# Altium PCB Copy of Capstone.PcbDoc
Units mil, origin at the board's own origin, x right, y up, seen from the top; angles counter-clockwise.
Board outline 6000 x 4000 mil, 4 copper layers (Top Layer 1, GND, 5V 3.3V, Bottom Layer 1), stack 23.756 mil thick; 28 components, 36 nets, 185 pads, 0 vias.
Unrouted connection lines stored in the file: 73.
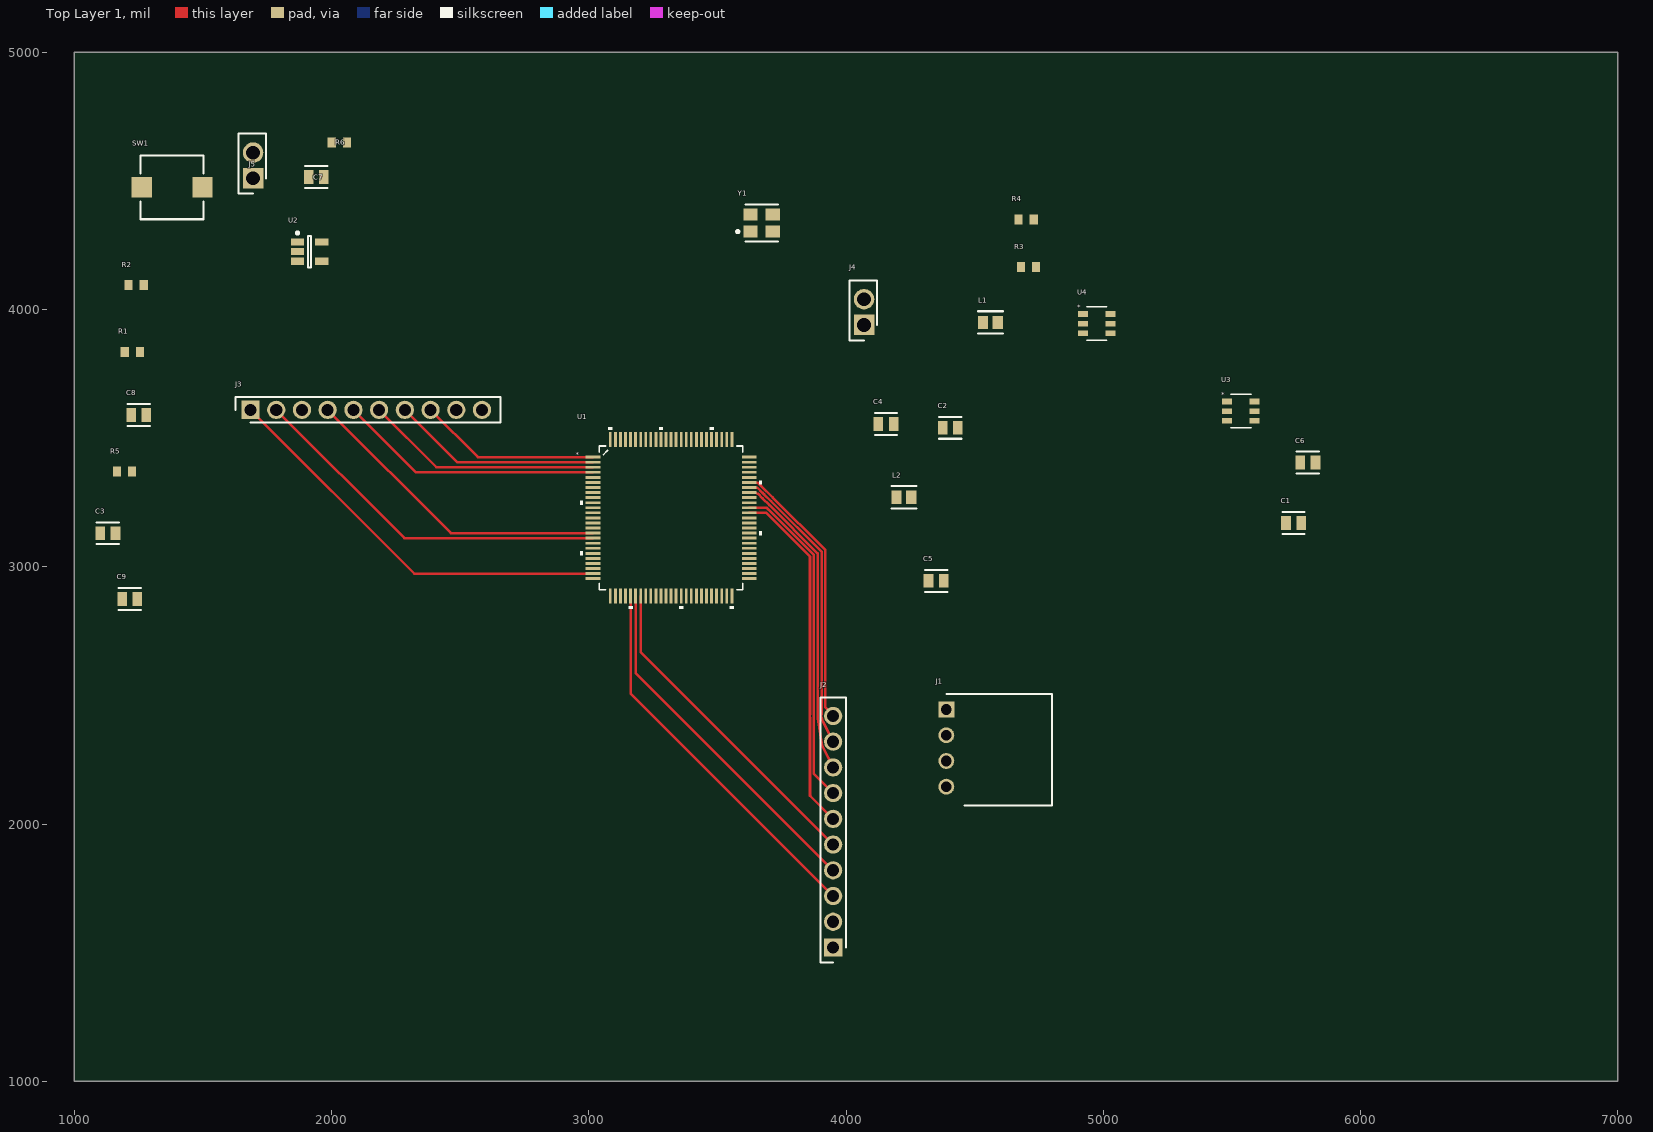
[diagram p0: Top Layer 1 view]
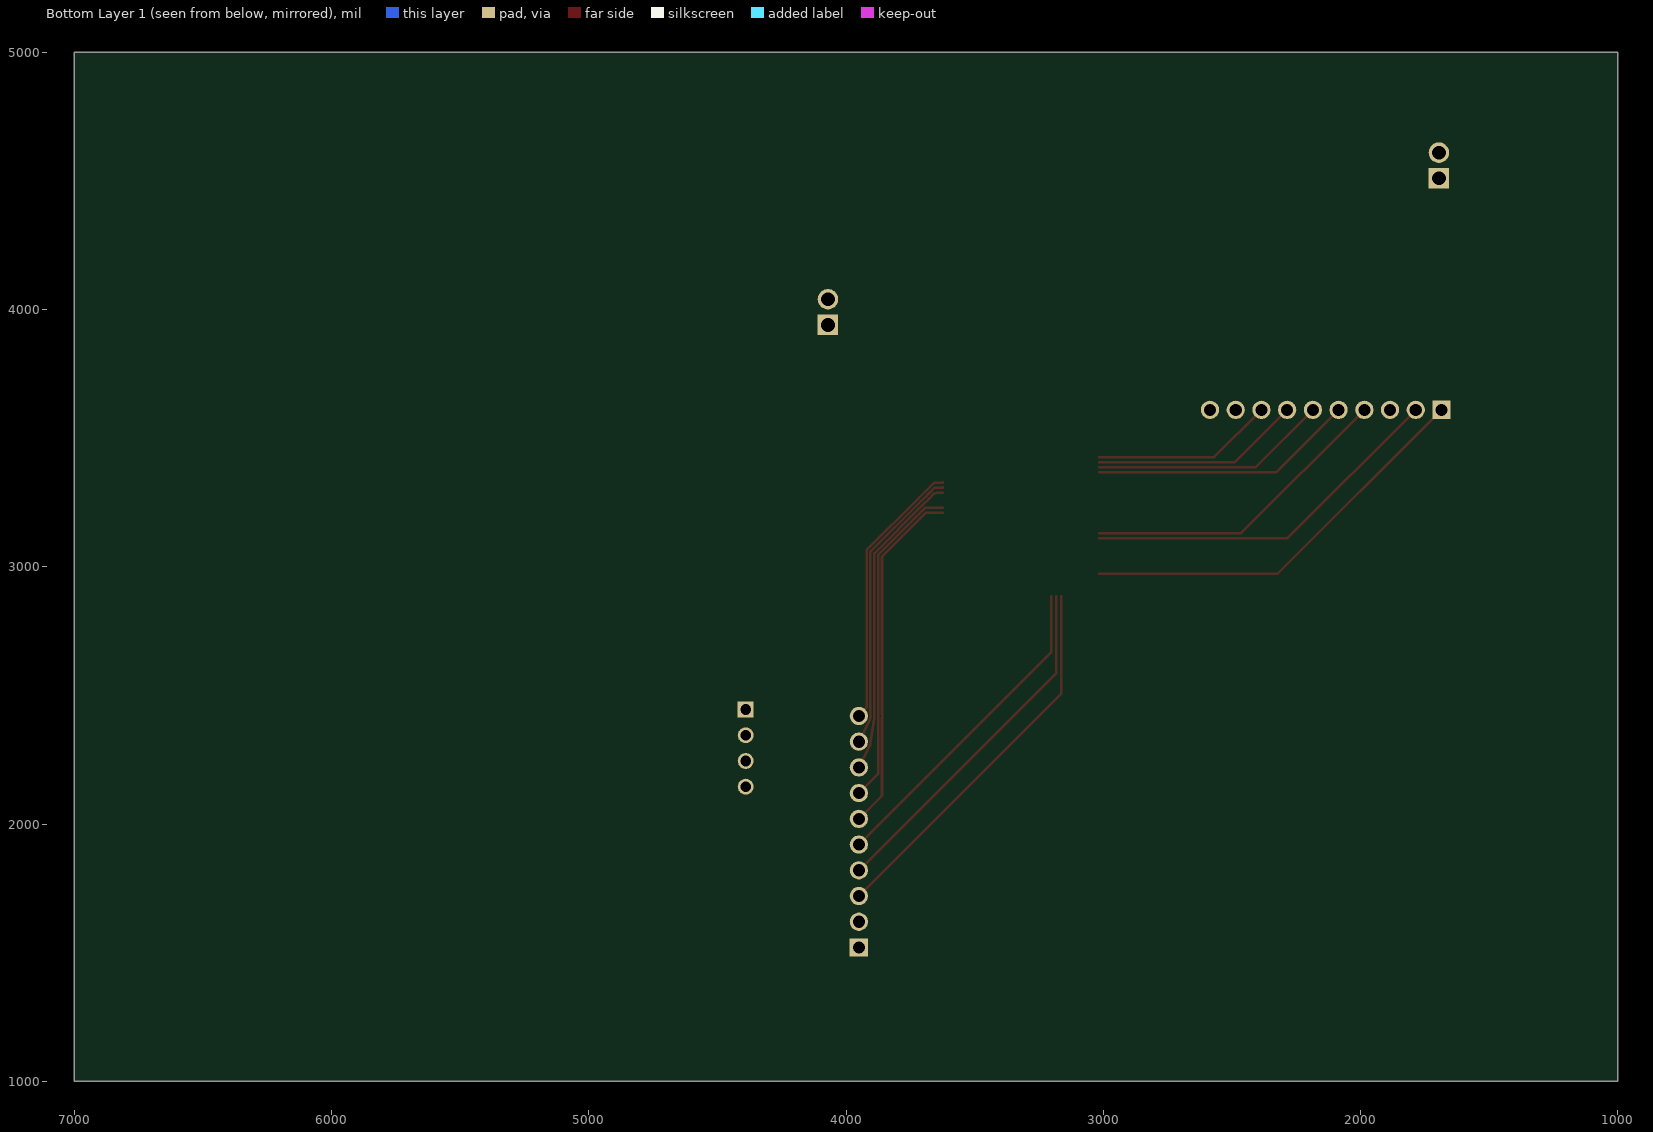
[diagram p1: Bottom Layer 1 view, seen from below]
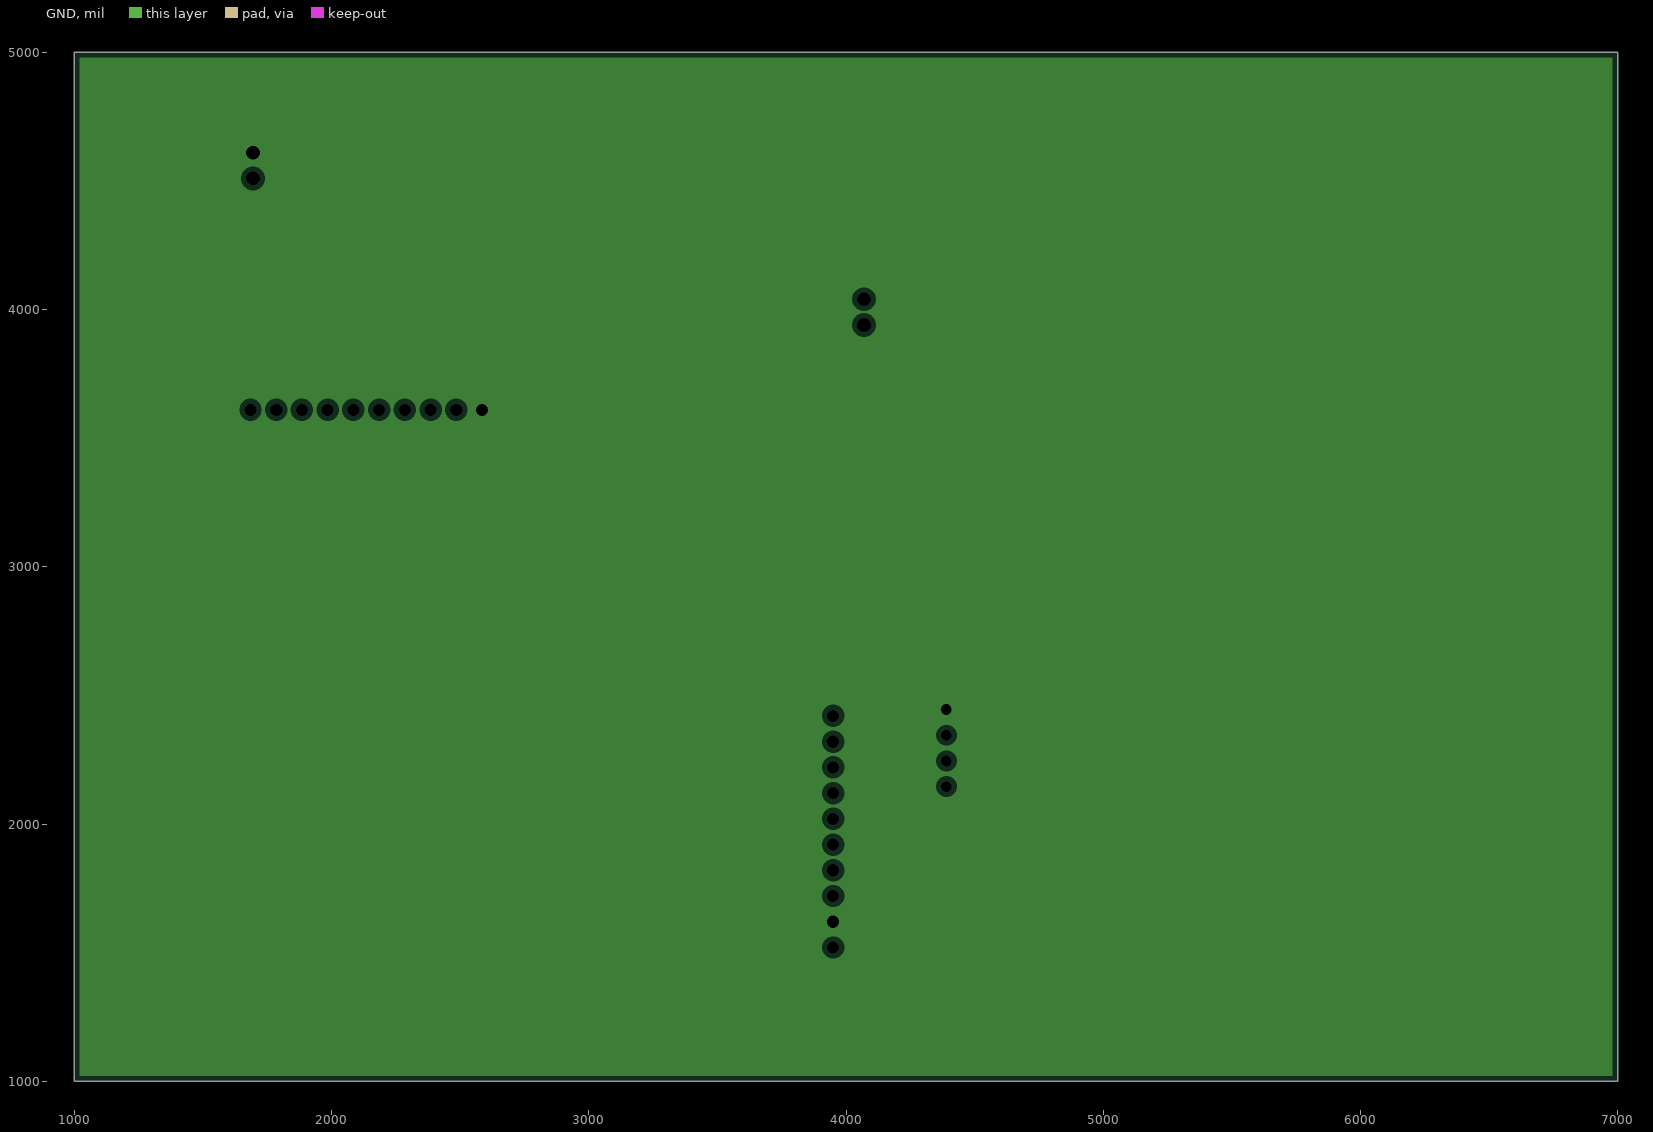
[diagram p2: GND, clearances drawn from the general rule]
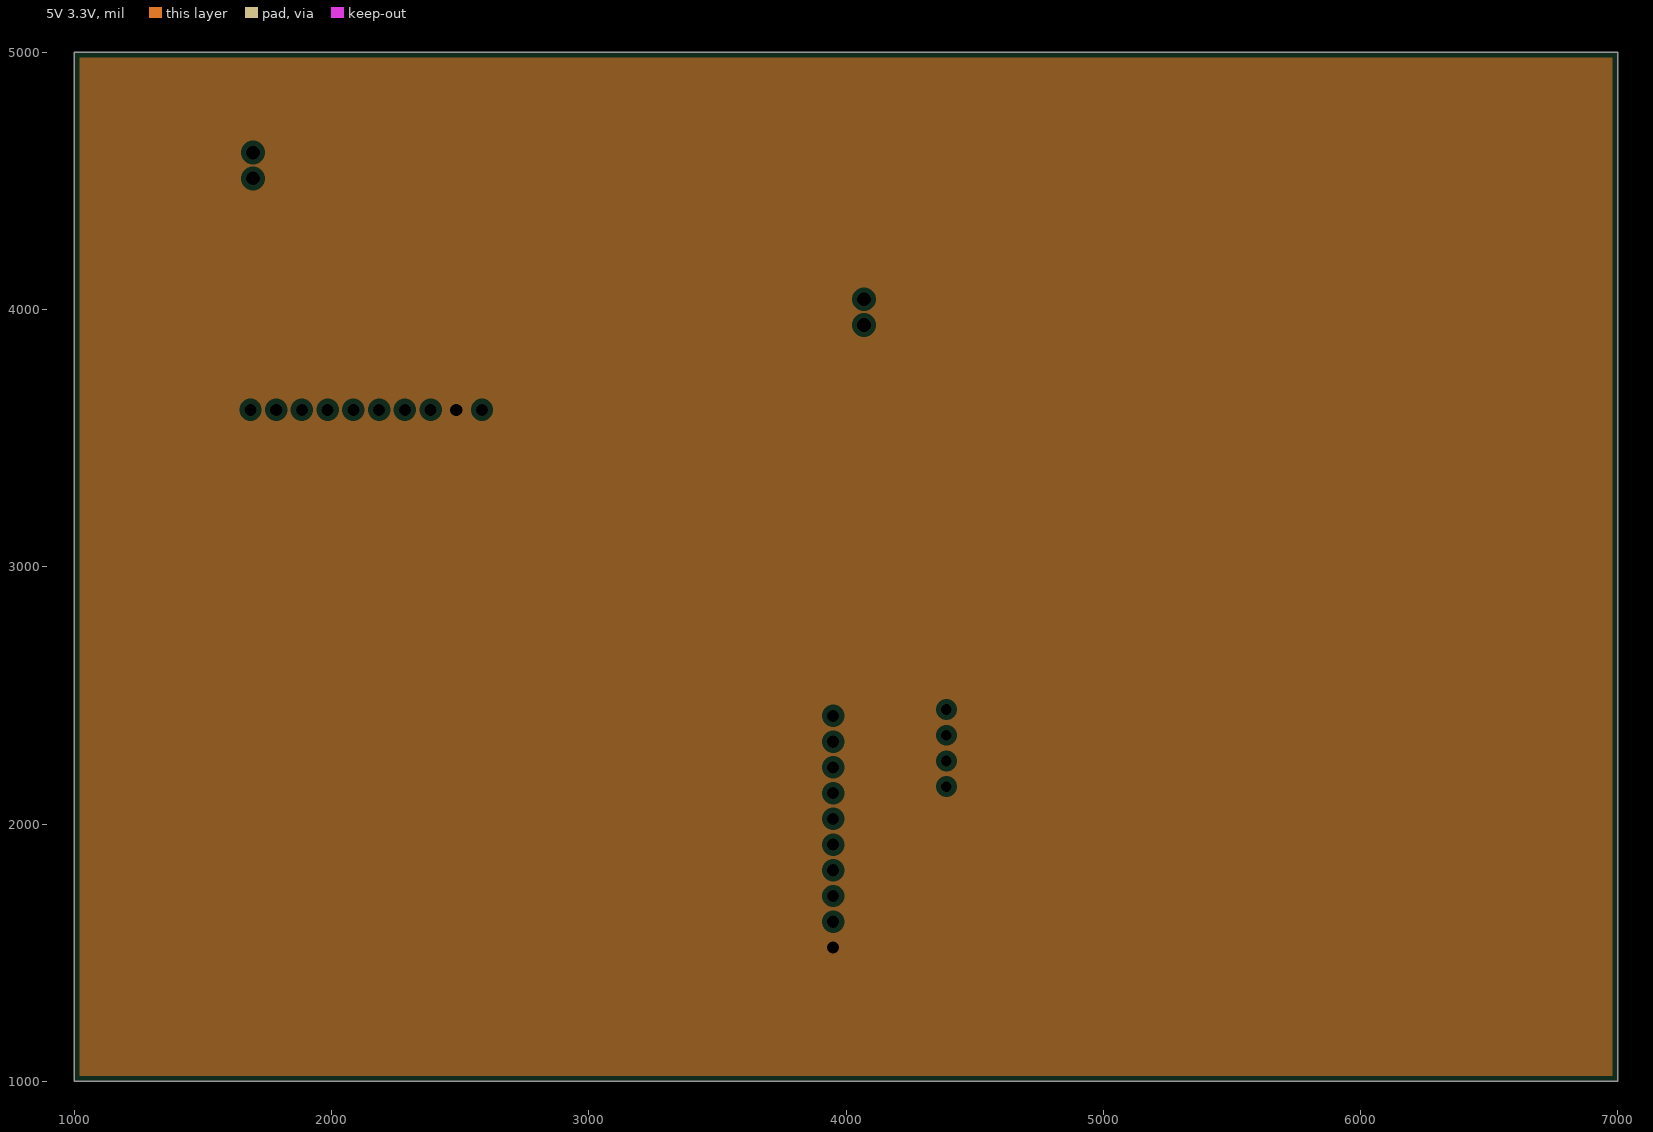
[diagram p3: 5V 3.3V, clearances drawn from the general rule]

## Layer stack, top to bottom
Top Solder: solder mask 0.4, Solder Resist, Dk 3.5
Top Layer 1: signal copper 1.378
Dielectric 2: prepreg 2.8, PP-006, Dk 4.1
GND: plane copper 1.4, net GND
Dielectric 1: dielectric 12.6, FR-4, Dk 4.8
5V 3.3V: plane copper 1.4, net 3.3V
Dielectric 3: prepreg 2.8, PP-006, Dk 4.1
Bottom Layer 1: signal copper 1.378
Bottom Solder: solder mask 0.4, Solder Resist, Dk 3.5

## Board outline
1000,1000 7000,1000 7000,5000 1000,5000

## Design rules (kind name [scope] priority, off if disabled: settings)
Clearance [All] p1: gap=5 ignorepadtopadclearanceinfootprint=FALSE
PlaneClearance [All] p1: clearance=20
PlaneConnect [All] p1: planeconnectstyle=Direct reliefexpansion=20 reliefentries=4 reliefconductorwidth=10 reliefairgap=10
PolygonConnect [All] p1: connectstyle=Relief reliefconductorwidth=10 reliefentries=4 polygonreliefangle="90 Angle" airgapwidth=10
RoutingVias [All] p1: holewidth=28 width=50 viastyle="Through Hole" minholewidth=28 minwidth=50 maxholewidth=28 maxwidth=50
SolderMaskExpansion [All] p1: expansion=4 istentingtop=FALSE
SupplyNets "Schematic Supply Nets_2" [InNet('GND')] p1: voltage=0.000
SupplyNets "Schematic Supply Nets_1" [InNet('5V')] p2: voltage=0.000
Width [All] p1: maxlimit=10 minlimit=10 preferedwidth=10
28 further rules are at their usual default settings.

## Classes and differential pairs
component class "U_Buck Converter 3.3V": C1 C2 C4 C5 L1 R3 R4 U3
component class "U_Buck Converter 5V": C6 C7 C8 C9 L2 R5 R6 U4
component class Capstone: C3 J1 J2 J3 J4 J5 R1 R2 SW1 U1 U2 Y1

## Components (designator, comment, footprint, x,y, rotation, side; value= is the part's Value field where it differs from the comment)
C1 "100nF" FP-C0805C-DN-MFG 5740,3170 r0 top value=10uF
C2 "10uF" FP-C0805C-DN-MFG 4405.47,3540 r0 top
C3 ".1uF" FP-C0805C-DN-MFG 1130.47,3130 r0 top value=10uF
C4 "100nF" FP-C0805C-DN-MFG 4155.47,3555 r0 top value=10uF
C5 "22uF" FP-C0805C-DN-MFG 4350.47,2945 r0 top value=10uF
C6 "100nF" FP-C0805C-DN-MFG 5795.47,3405 r0 top value=10uF
C7 "10uF" FP-C0805C-DN-MFG 1940.47,4515 r0 top
C8 "100nF" FP-C0805C-DN-MFG 1250.47,3590 r0 top value=10uF
C9 "10uF" FP-C0805C-DN-MFG 1215.47,2875 r0 top
J1 "PPPC041LGBN-RC" RHDRRA4W60P0X254_1X4_1066X850X274P 4390,2445 r270 top
J2 "M20-7821046" RHDR10W70P0X254_1X10_2580X250X865P 3950,1520 r90 top
J3 "M20-7821046" RHDR10W70P0X254_1X10_2580X250X865P 1685,3610 r0 top
J4 "PPPC021LFBN-RC" RHDR2W80P0X254_1X2_558X254X850P 4070,3940 r90 top
J5 "PPPC021LFBN-RC" RHDR2W80P0X254_1X2_558X254X850P 1695,4510 r90 top
L1 "4.7uH" FP-LQM21PH_G0-IPC_C 4561.41,3950 r0 top
L2 "4.7uH" FP-LQM21PH_G0-IPC_C 4225,3270 r0 top
R1 "1k" RESC1608X55X25ML10T15 1225.47,3835 r0 top
R2 "1k" RESC1608X55X25ML10T15 1240.47,4095 r0 top
R3 "69.8k" RESC1608X55X25ML10T15 4709.53,4165 r180 top
R4 "22.1k" RESC1608X55X25ML10T15 4700.47,4350 r0 top
R5 "115k" RESC1608X55X25ML10T15 1195.47,3370 r0 top
R6 "22.1k" RESC1608X55X25ML10T15 2030.47,4650 r0 top
SW1 "EVPASAC1A" FP-EVPASAC1A-MFG 1380,4475 r0 top
U1 "STM32U5A5VJT6" LQFP-100_STM 3320,3190 r0 top
U2 "MCP3021A5T-E/OT" SOT-23-OT5_M 1915,4225 r0 top
U3 "PLMR54410DBVR" U_SOT-23_TEX 5535,3605 r0 top
U4 "PLMR54410DBVR" U_SOT-23_TEX 4975,3945 r0 top
Y1 "ABM8G-24.000MHZ-B4Y-T3" FP-ABM8G-MFG 3671.69,4336.54 r0 top

## Footprints (in the part's own frame and the unit in brackets; to place one, negate y for a bottom-side part, rotate by r counter-clockwise, add the part's x,y. Pads: shape width x height; smd on the part's side, far side on the other; paste and mask are expansions set on the pad)
FP-ABM8G-MFG [mm]
  rect 1.4x1.2 smd paste+0 mask+0: 1(-1.1,-0.85) 2(1.1,-0.85) 3(1.1,0.85) 4(-1.1,0.85)
  silkscreen extent -2.47,-1.83 1.6,1.83, body extent -1.9,-1.55 1.9,1.55, height 0.25
FP-C0805C-DN-MFG [mm]
  rect 0.95x1.35 smd paste+0 mask+0: 1(-0.75,0) 2(0.75,0)
  silkscreen extent -1.1,-1.07 1.1,1.07, body extent -1.4,-0.85 1.4,0.85, height 0.25
FP-EVPASAC1A-MFG [mm]
  rect 2x2 smd paste+0 mask+0: A(-3,0) B(3,0)
  silkscreen extent -3.1,-3.15 3.1,3.15, body extent -4.1,-3.25 4.1,3.25, height 0.25
FP-LQM21PH_G0-IPC_C [mil]
  rect 39.61x51.5 smd paste+0 mask+0: 1(-28.59,0) 2(28.59,0)
  silkscreen extent -48,-43 48,43, body extent -52,-31 52,31, height 10
LQFP-100_STM [mil]
  rect 58x11 smd paste+0 mask+0: 1(-304,236.22) 2(-304,216.54) 3(-304,196.85) 4(-304,177.17) 5(-304,157.48) 6(-304,137.8) 7(-304,118.11) 8(-304,98.43) 9(-304,78.74) 10(-304,59.06) 11(-304,39.37) 12(-304,19.69) 13(-304,0) 14(-304,-19.68) 15(-304,-39.37) 16(-304,-59.06) 17(-304,-78.74) 18(-304,-98.43) 19(-304,-118.11) 20(-304,-137.8) 21(-304,-157.48) 22(-304,-177.17) 23(-304,-196.85) 24(-304,-216.54) 25(-304,-236.22) 51(304,-236.22) 52(304,-216.54) 53(304,-196.85) 54(304,-177.17) 55(304,-157.48) 56(304,-137.8) 57(304,-118.11) 58(304,-98.43) 59(304,-78.74) 60(304,-59.06) 61(304,-39.37) 62(304,-19.68) 63(304,0) 64(304,19.68) 65(304,39.37) 66(304,59.06) 67(304,78.74) 68(304,98.43) 69(304,118.11) 70(304,137.8) 71(304,157.48) 72(304,177.17) 73(304,196.85) 74(304,216.54) 75(304,236.22)
  rect 11x58 smd paste+0 mask+0: 26(-236.22,-304) 27(-216.54,-304) 28(-196.85,-304) 29(-177.17,-304) 30(-157.48,-304) 31(-137.8,-304) 32(-118.11,-304) 33(-98.43,-304) 34(-78.74,-304) 35(-59.06,-304) 36(-39.37,-304) 37(-19.68,-304) 38(0,-304) 39(19.68,-304) 40(39.37,-304) 41(59.06,-304) 42(78.74,-304) 43(98.43,-304) 44(118.11,-304) 45(137.8,-304) 46(157.48,-304) 47(177.17,-304) 48(196.85,-304) 49(216.54,-304) 50(236.22,-304) 76(236.22,304) 77(216.54,304) 78(196.85,304) 79(177.17,304) 80(157.48,304) 81(137.8,304) 82(118.11,304) 83(98.43,304) 84(78.74,304) 85(59.06,304) 86(39.37,304) 87(19.68,304) 88(0,304) 89(-19.68,304) 90(-39.37,304) 91(-59.06,304) 92(-78.74,304) 93(-98.43,304) 94(-118.11,304) 95(-137.8,304) 96(-157.48,304) 97(-177.17,304) 98(-196.85,304) 99(-216.54,304) 100(-236.22,304)
  silkscreen extent -353,-353 353,353, body extent -319,-319 319,319, height 63
RESC1608X55X25ML10T15 [mm] "Chip Resistor, 2-Leads, Body 1.60x0.80mm, IPC Low Density"
  rect 0.8x1 smd: 1(-0.75,0) 2(0.75,0)
  body extent -0.85,-0.45 0.85,0.45, height 0.55
RHDR2W80P0X254_1X2_558X254X850P [mm]
  rect 2.025x2.025 hole 1.35: 1(0,0)
  round 2.025 hole 1.35: 2(2.54,0)
  silkscreen extent -1.52,-1.27 4.41,1.46, body extent -1.52,-1.27 4.06,1.27, height 8.5
RHDR10W70P0X254_1X10_2580X250X865P [mm]
  rect 1.8x1.8 hole 1.2: 1(0,0)
  round 1.8 hole 1.2: 2(2.54,0) 3(5.08,0) 4(7.62,0) 5(10.16,0) 6(12.7,0) 7(15.24,0) 8(17.78,0) 9(20.32,0) 10(22.86,0)
  silkscreen extent -1.47,-1.25 24.68,1.25, body extent -1.47,-1.25 24.33,1.25, height 8.65
RHDRRA4W60P0X254_1X4_1066X850X274P [mm]
  rect 1.575x1.575 hole 1.05: 1(0,0)
  round 1.575 hole 1.05: 2(2.54,0) 3(5.08,0) 4(7.62,0)
  silkscreen extent -1.52,0 9.49,10.45, body extent -1.52,-0.3 9.14,10.1, height 2.74
SOT-23-OT5_M [mm] "SOT23, 5-Leads, Body 2.9x1.7mm, Pitch 0.95mm, Lead Span 2.8mm, IPC Low Density"
  rect 1.3x0.7 smd: 1(-1.2,0.95) 2(-1.2,0) 3(-1.2,-0.95) 4(1.2,-0.95) 5(1.2,0.95)
  silkscreen extent -1.32,-1.55 0.15,1.97, body extent -0.9,-1.55 0.9,1.55, height 1.45
U_SOT-23_TEX [mil]
  rect 38.5x22 smd paste+0 mask+0: 1(-53.75,37.4) 2(-53.75,0) 3(-53.75,-37.4) 4(53.75,-37.4) 5(53.75,0) 6(53.75,37.4)
  silkscreen extent -40,-65 40,65, body extent -59,-60 59,60, height 57

## Part data
C1 C3 C4 C5 C6 C8: library part CMP-1036-04552-2, "CAP CER 0.22UF 50V X7R 0805", Capacitance=10uF, Manufacturer=KEMET, Manufacturer Part Number=C0805C224K5RACTU, Package=C0805C-DN, Temperature="-55°C to +125°C", Temperature Characteristic=X7R, Temperature Coefficient=30ppm/°C, Temperature Range High=+125°C, Temperature Range Low=-55°C, Tolerance=0.1, Voltage Rating="50 V", Automotive=No, Category=Cap, ComponentLink2Description=Datasheet, ComponentLink2URL=https://content.kemet.com/datasheets/KEM_C1003_C0G_SMD.pdf, Device Class L1="Passive Components", Device Class L2=Capacitors, Device Class L3="Ceramic Capacitors", Digikey Description="CAP CER 0.22UF 50V X7R 0805", Height=0.88mm, Ipc Land Pattern Name=CAPC200125X78, Lead Free=Yes, Material=Ceramic, Mouser Description="CAP CER 0.22UF 50V X7R 0805", Octopart=https://octopart.com/c0805c224k5ractu-kemet-144670, RoHS=TRUE
C2 C7 C9: library part CMP-1036-04552-2, "CAP CER 0.22UF 50V X7R 0805", Manufacturer=KEMET, Manufacturer Part Number=C0805C224K5RACTU, Package=C0805C-DN, Temperature="-55°C to +125°C", Temperature Characteristic=X7R, Temperature Coefficient=30ppm/°C, Temperature Range High=+125°C, Temperature Range Low=-55°C, Tolerance=0.1, Voltage Rating="50 V", Automotive=No, Capacitance=10uF, Category=Cap, ComponentLink2Description=Datasheet, ComponentLink2URL=https://content.kemet.com/datasheets/KEM_C1003_C0G_SMD.pdf, Device Class L1="Passive Components", Device Class L2=Capacitors, Device Class L3="Ceramic Capacitors", Digikey Description="CAP CER 0.22UF 50V X7R 0805", Height=0.88mm, Ipc Land Pattern Name=CAPC200125X78, Lead Free=Yes, Material=Ceramic, Mouser Description="CAP CER 0.22UF 50V X7R 0805", Octopart=https://octopart.com/c0805c224k5ractu-kemet-144670, RoHS=TRUE
J1 J4 J5: "Connector", Manufacturer_Name=Sullins
  J1: Datasheet Link=https://drawings-pdf.s3.amazonaws.com/10493.pdf, Height=2.74mm, Manufacturer_Part_Number=PPPC041LGBN-RC
  J4 J5: Datasheet Link=http://www.sullinscorp.com/drawings/78_P(N)PxCxxxLFBN-RC,_10492-H.pdf, Height=8.5mm, Manufacturer_Part_Number=PPPC021LFBN-RC
J2 J3: "Connector", Manufacturer_Name=Harwin, Mouser Part Number=855-M20-7821046, Datasheet Link=https://cdn.harwin.com/pdfs/M20-782.pdf, Height=8.65mm, Manufacturer_Part_Number=M20-7821046, Mouser Price/Stock=https://www.mouser.co.uk/ProductDetail/Harwin/M20-7821046?qs=Jph8NoUxIfXTsFl0wvOA6g%3D%3D
L1 L2: library part CMP-06042-017025-1, "Multilayer Type Inductor for Power Lines, 0805 (2012), 4.7μH, 20%, 0.288Ω, 0.8A", Case Code (Imperial)=0805, Case Code (Metric)=2012, Current Rating=800mA, DC Resistance (DCR)=288mR, Max Operating Temperature=125°C, Min Operating Temperature=-55°C, Package Quantity=4000, Self Resonant Frequency=30MHz, Test Frequency=1MHz, Tolerance=20%, Case/Package=0805, Core Material=Ferrite, Height - Seated (Max)=0.039inch, Inductance=4.7uH, Length=0.079inch, Mount="Surface Mount", Packaging="Cut Tape", RoHS Compliant=Yes, Shielding=Shielded, Width=0.049inch
R1 R2 R3 R4 R5 R6: library part CMP-2100-03667-1, "Chip Resistor, 0 Ohm, +/- 5%, 0.1 W, -55 to 155 degC, 0603 (1608 Metric), RoHS, Tape and Reel", Case Code (Imperial)=0603, Case Code (Metric)=1608, Manufacturer=Yageo, Max Operating Temperature=155degC, Min Operating Temperature=-55degC, Package Description="2-Pin Surface Mount Device, Body 1.6 x 0.8 mm", Package Quantity=5000, Power Rating=100mW, Resistance=0mOhm, Temperature Coefficient=200ppm/degreesC, Tolerance=5%, Voltage Rating=50V, Case/Package=0603, Composition=ThickFilm, Contact Plating=Tin, Datasheet URL=http://www.yageo.com/NewPortal/yageodocoutput?fileName=/pdf/R-Chip/PYu-RC_Group_51_RoHS_L_5.pdf, Datasheet Version="Rev. 5, 10/2016", Depth=0.8mm, Height=0.45mm, Lead Free=LeadFree, Length=1.6mm, Manufacturer URL=http://www.yageo.com/, Military Standard=Not, Number of Pins=2, Package Reference=0603, Packaging=TapeandReel, Radiation Hardening=No, REACH SVHC=NoSVHC, RoHSCompliant=true, Termination=SMD/SMT, Voltage Rating (DC)=50V, Width=0.8mm
SW1: library part CMP-05618-000055-1, "SWITCH TACTILE SPST-NO 0.05A 12V", Color=Black, Current Rating=50mA, Max Operating Temperature=90°C, Max Voltage Rating (DC)=12V, Min Operating Temperature=-40°C, Operating Force=1.6N, Package Quantity=2000, Depth=6.1mm, Height=0.7mm, Illumination Type=Non-Illuminated, Length=7mm, Max Current Rating=50mA, Mechanical Life=100000Cycles, Mount="Surface Mount", Orientation=Straight, Packaging="Tape and Reel", Radiation Hardening=No, RoHS Compliant=Yes, Switch Function=Off-Mom, Switch Travel=1.3mm, Termination=J-Bend, Throw Configuration=SPST, Voltage Rating (DC)=12V
U1: "No Description Available", Mfr_Name=STMicroelectronics, RefDes=RefDes, Type=Type
U2: library part CMP-0188-00726-2, "Low Power 10-Bit A/D Converter With I2C Interface, 5-Pin SOT-23, Extended Temperature, Tape and Reel", Code_IPC=SOT23-5, ComponentLink1Description="Manufacturer URL", ComponentLink1URL=http://www.microchip.com/, ComponentLink2Description=Datasheet, ComponentLink2URL=http://ww1.microchip.com/downloads/en/DeviceDoc/21805a.pdf, ComponentLink3Description="Package Specification", ComponentLink3URL=http://www.microchip.com/stellent/groups/techpub_sg/documents/packagingspec/en012702.pdf, DatasheetVersion="revA, May-2003", PackageDescription="5-Lead Plastic Small Outline Transistor (OT) [SOT-23]", PackageReference=SOT-23-OT5, PackageVersion="revBB, Aug-2009", RevisionNote="URLs added."
U3 U4: "No Description Available", Mfr_Name="Texas Instruments", RefDes=RefDes, Type=Type
Y1: library part CMP-27762-014656-1, "Crystal 24MHz ±30ppm (Tol) ±30ppm (Stability) 10pF FUND 60Ω 4-Pin SMD T/R", Case/Package=SMD/SMT, ESR (Equivalent Series Resistance)=60R, Frequency=24MHz, Frequency Stability=30ppm, Load Capacitance=10pF, Max Operating Temperature=70°C, Min Operating Temperature=-20°C, Package Quantity=3000, Frequency Tolerance=30ppm, Height=1mm, Length=3.2mm, Mount="Surface Mount", Number of Pins=4, Packaging="Tape and Reel", Series=ABM8G, Series Resistance=60R, Termination=SMD/SMT, Tolerance=30ppm, Width=2.5mm

## Nets (pads, with @x,y where several pads share a name; then routed paths per layer and width w, separated by ;. In a path a pad name is that pad's centre, name@x,y a point inside that pad or via, vN(x,y) a via of type N, cw(c..) or ccw(c..) an arc to the next point about the centre after c; other vN are vias at no path point)
3.3V: C2.2 C4.2 C5.1 C5.2 J2.1 J3.9 L1.2 R3.2 R4.1 U1.6 U1.11 U1.22 U1.28 U1.50 U1.73 U1.75 U1.100 U3.2
5V: C7.2 C8.2 C9.1 C9.2 J1.4 L2.2 R5.2 R6.1 U2.1 U4.2
DEBUG_SWCLK: J4.2 U1.76
DEBUG_SWDIO: J4.1 U1.72
DISP_CARD_CS: J3.6 U1.3 | length 923.4
  Top Layer 1 w10: J3.6 2408.15,3386.85 U1.3
DISP_DC: J3.7 U1.2 | length 815.3
  Top Layer 1 w10: J3.7 2488.46,3406.54 U1.2
DISP_LITE: J3.1 U1.24 | length 1594.7
  Top Layer 1 w10: J3.1 2321.54,2973.46 U1.24
DISP_MISO: J3.2 U1.17 | length 1437.6
  Top Layer 1 w10: J3.2 2283.74,3111.26 U1.17
DISP_MOSI: J3.4 U1.16 | length 1229.4
  Top Layer 1 w10: J3.4 2464.06,3130.94 U1.16
DISP_RST: J3.8 U1.1 | length 707.1
  Top Layer 1 w10: J3.8 2568.78,3426.22 U1.1
DISP_SCK: J3.3 U1.47
DISP_TFT_CS: J3.5 U1.4 | length 1031.6
  Top Layer 1 w10: J3.5 2327.83,3367.17 U1.4
DIST_ECHO: J1.3 U1.40
DIST_TRIG: J1.2 U1.41
GND: C3.2 J1.1 J2.2 J3.10 J5.2 R2.2 SW1.B U1.10 U1.19 U1.20 U1.21 U1.27 U1.48 U1.49 U1.74 U1.94 U1.99 U2.2 Y1.2 Y1.4
NetC1_1: C1.1 U3.1
NetC1_2: C1.2 L1.1 U3.6
NetC3_1: C3.1 SW1.A U1.14
NetC6_1: C6.1 U4.1
NetC6_2: C6.2 L2.1 U4.6
NetR1_1: R1.1 R2.1 U2.3
NetR3_1: R3.1 R4.2 U3.3
NetR5_1: R5.1 R6.2 U4.3
NetU1_12: U1.12 Y1.3
NetU1_13: U1.13 Y1.1
PWR_SCL: U1.92 U2.5
PWR_SDA: U1.89 U2.4
V_IN: C2.1 C4.1 C7.1 C8.1 J5.1 R1.2 U3.4 U3.5 U4.4 U4.5
WIFI_CS: J2.6 U1.64 | length 1363.6
  Top Layer 1 w10: U1.64 3690.31,3209.68 3860,3040 3860,2428.84 ccw(c3950,2420) 3860,2411.16 3860,2110 3862.93,2107.07 J2.6
WIFI_EN: J2.7 U1.65 | length 1283.9
  Top Layer 1 w10: U1.65 3690.63,3229.37 3696.53,3224.68 3875,3046.21 3875,2428.07 ccw(c3950,2420) 3875,2411.93 3875,2195 3877.93,2192.07 J2.7
WIFI_IRQ: J2.8 U1.68 | length 1206.5
  Top Layer 1 w10: U1.68 3648,3287.93 3657.14,3284.24 3675.28,3266.1 3702.74,3239.68 3890,3052.43 3890,2427.22 ccw(c3950,2420) 3890.25,2410.93 3905.08,2313.18 ; 3905.08,2313.16 ccw(c3950,2320) 3909.53,2299.36 J2.8
WIFI_MISO: J2.4 U1.31 | length 1384
  Top Layer 1 w10: U1.31 3182.2,2587.8 J2.4
WIFI_MOSI: J2.5 U1.32 | length 1275.9
  Top Layer 1 w10: U1.32 3201.89,2668.11 J2.5
WIFI_RST: J2.9 U1.69 | length 1133.2
  Top Layer 1 w10: U1.69 3624.5,3307.61 3654.99,3307.61 3675.63,3286.96 3681.49,3281.1 3708.95,3254.68 3905,3058.64 3905,2426.26 ccw(c3950,2420) 3909.49,2399.42 3909.55,2399.32 J2.9
WIFI_SCK: J2.3 U1.30 | length 1492.2
  Top Layer 1 w10: U1.30 3162.52,2507.48 J2.3
WIFI_WAKE: J2.10 U1.70 | length 1061.9
  Top Layer 1 w10: U1.70 3624.5,3327.3 3656.51,3327.3 3669.54,3314.27 3715.17,3269.68 3920,3064.85 3920,2453.04 3950,2423.04 J2.10
pads on no net: U1.5 U1.7 U1.8 U1.9 U1.15 U1.18 U1.23 U1.25 U1.26 U1.29 U1.33 U1.34 U1.35 U1.36 U1.37 U1.38 U1.39 U1.42 U1.43 U1.44 U1.45 U1.46 U1.51 U1.52 U1.53 U1.54 U1.55 U1.56 U1.57 U1.58 U1.59 U1.60 U1.61 U1.62 U1.63 U1.66 U1.67 U1.71 U1.77 U1.78 U1.79 U1.80 U1.81 U1.82 U1.83 U1.84 U1.85 U1.86 U1.87 U1.88 U1.90 U1.91 U1.93 U1.95 U1.96 U1.97 U1.98

## Polygon pours and split planes (outlines as drawn)
3.3V on 5V 3.3V (split plane): 6979.9,1020.1 1020.1,1020.1 1020.1,4979.9 6979.9,4979.9
GND on GND (split plane): 6979.9,1020.1 1020.1,1020.1 1020.1,4979.9 6979.9,4979.9

## Silkscreen, mask and mechanical layers (free items; w line width, h text height)
Mechanical 1:
  region: 2820,1475 2820,3675 1470,3675 1470,1475
  region: 5602.4,3165.82 5602.4,1394.17 4815,1394.17 4815,3165.82
  region: 2935,1475 2935,2775 4035,2775 4035,1475

## Text inside footprints (layer, text, board x,y; h text height)
U1: Top 3D Body "*" at 2949.5,3426.06 h20; Top Overlay "*" at 2949.5,3426.06 h20
U3: Top 3D Body "*" at 5503,3612 h20; Top Overlay "*" at 5458.75,3659.4 h20
U4: Top 3D Body "*" at 4943,3952 h20; Top Overlay "*" at 4898.75,3999.4 h20